# EAGLE board me433_hw2 (EAGLE 5.12)
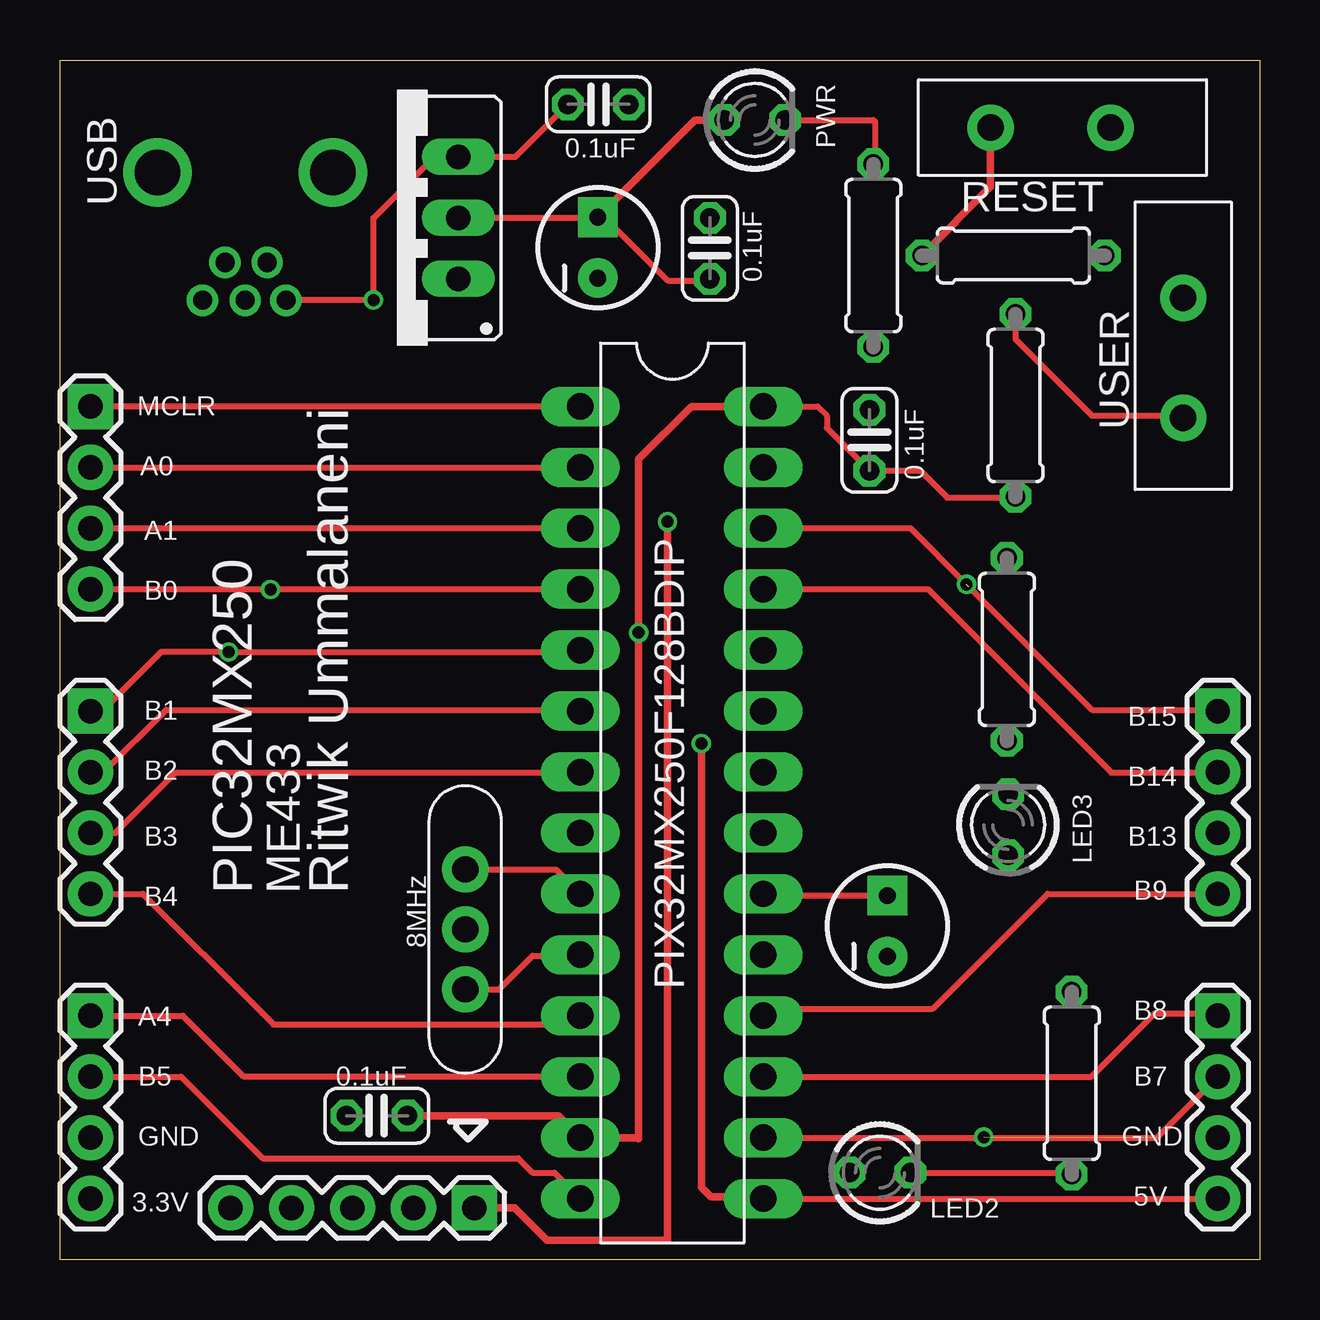
[diagram p0: board, top side]
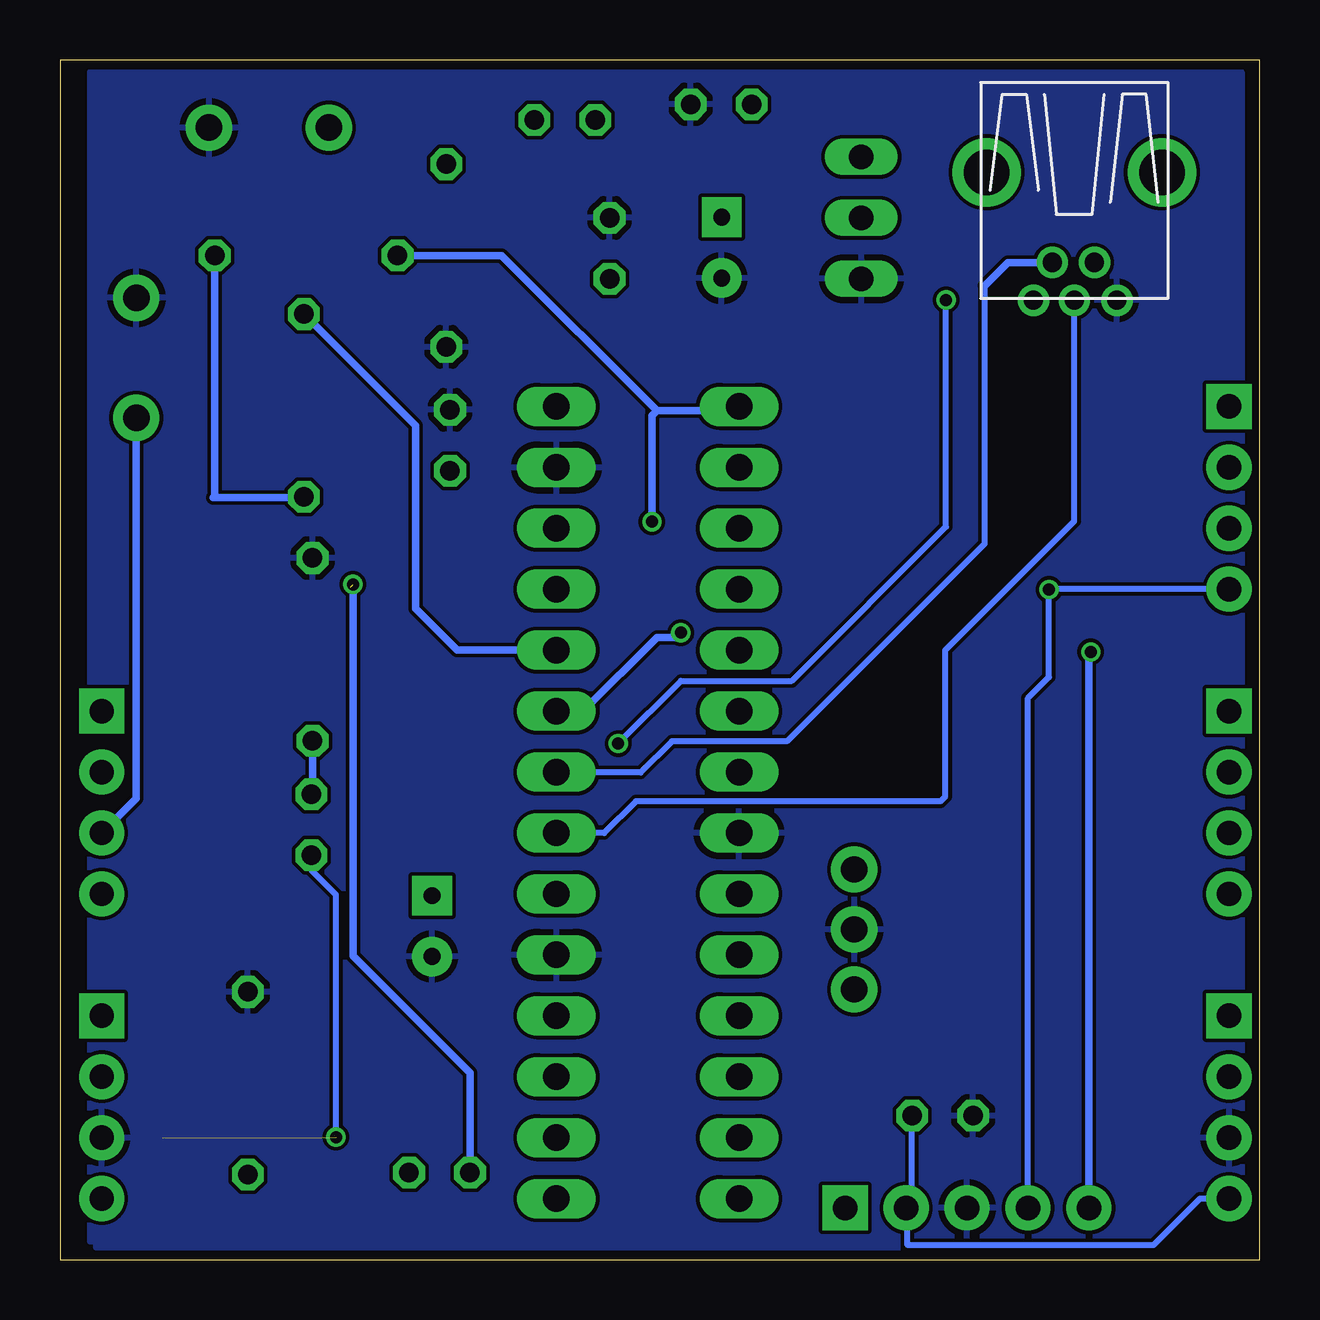
[diagram p1: board, bottom side, seen from below]

Size 50 x 50 mm. Coordinates in mm from the lower left corner, seen from the top.
Outline: 50,50 50,0 0,0 0,50 50,50
Copper layers (1*16): Top 0.035mm / dielectric 1.5mm / Bottom 0.035mm
Design rules "SeedStudio_hw2": minimum track width 6mil, minimum drill 12mil, track to track 6mil, track to pad 6mil, pad to pad 6mil, via to via 6mil, smd to smd 0mil, copper to edge 10mil, drill to drill 10mil, minimum pad ring 10mil, minimum via ring 6mil, stop-mask expansion 2mil, vias tented up to drill 100mil, thermal gap 10mil

## Footprints (pad centres in the part's own frame; a part is rotated, then mirrored left to right if it is on the bottom)
UM4 = drill 1.1 pad 1.93 round: 1 -5,-7.5; 2 0,-7.5; 3 -2.5,-7.5
C025-024X044 = drill 0.813 octagon: 1 -1.27,0; 2 1.27,0
LED3MM = drill 0.813 octagon: A -1.27,0; K 1.27,0
0207/7 = drill 0.813 octagon: 1 -3.81,0; 2 3.81,0
PIC_HEADER = drill 1.1 long: 1 -53.34,22.86; 2 -53.34,20.32; 3 -53.34,17.78; 4 -53.34,15.24; 5 -53.34,12.7; 6 -53.34,10.16; 7 -53.34,7.62; 8 -53.34,5.08; 9 -53.34,2.54; 10 -53.34,0; 11 -53.34,-2.54; 12 -53.34,-5.08; 13 -53.34,-7.62; 14 -53.34,-10.16; 15 -45.72,-10.16; 16 -45.72,-7.62; 17 -45.72,-5.08; 18 -45.72,-2.54; 19 -45.72,0; 20 -45.72,2.54; 21 -45.72,5.08; 22 -45.72,7.62; 23 -45.72,10.16; 24 -45.72,12.7; 25 -45.72,15.24; 26 -45.72,17.78; 27 -45.72,20.32; 28 -45.72,22.86
1X05 = drill 1.016 pad 1.88 square: 1 0,0 | drill 1.016 pad 1.88 round: 2 2.54,0; 3 5.08,0; 4 7.62,0; 5 10.16,0
USB-MINIB = drill 0.8 round: D+ 4.064,0; D- 2.489,0.914; GND 4.064,-1.778; ID 2.489,-0.838; VBUS 4.064,1.702 | drill 1.9 round: P$6 -1.27,-3.65; P$7 -1.27,3.65
TO220 = drill 1.016 long: 1 -2.54,0; 2 0,0; 3 2.54,0
CAP_POL_D = drill 0.7 pad 1.651 square: 1 1.27,0 | drill 0.7 pad 1.651 round: 2 -1.27,0
PUSH_SWITCH = drill 1.1 pad 1.93 round: 1 -5,0; 2 0,0
1X04 = drill 1.016 pad 1.88 square: 1 0,0 | drill 1.016 pad 1.88 round: 2 2.54,0; 3 5.08,0; 4 7.62,0

## Placement (x,y rotation side)
8MHZ  XTAL_8  [UM4]  24.39,11.26 270 top
C1  0.1uF  [C025-024X044]  22.44,48.15 0 top
C2  0.1uF  [C025-024X044]  27.09,42.15 90 top
C3  0.1uF  [C025-024X044]  33.74,34.15 90 top
C4  0.1uF  [C025-024X044]  13.21,6 180 top
LED2  [LED3MM]  34.18,3.62 0 top
LED3  [LED3MM]  39.52,18.12 90 top
PWR  [LED3MM]  28.96,47.5 0 top
R1  330  [0207/7]  33.9,41.85 90 top
R2  10k  [0207/7]  39.74,41.85 0 top
R3  10k  [0207/7]  39.83,35.6 270 top
R4  330  [0207/7]  42.17,7.35 270 top
R5  330  [0207/7]  39.47,25.43 270 top
U$1  PIX32MX250F128BDIP  [PIC_HEADER]  75.03,12.7 0 top
U$2  PICKit3  [1X05]  17.27,2.15 180 top
U$4  USB  [USB-MINIB]  7.72,44.05 270 top
U$5  LD1117  [TO220]  16.6,43.42 90 top
U$6  10uF  [CAP_POL_D]  22.42,42.18 90 top
U$8  RESET  [PUSH_SWITCH]  43.79,47.18 0 top
U$10  10uF  [CAP_POL_D]  34.49,13.9 90 top
U$12  USER  [PUSH_SWITCH]  46.82,40.09 90 top
U$13  1X04_HEADER  [1X04]  1.27,35.56 270 top
U$14  1X04_HEADER  [1X04]  1.27,22.86 270 top
U$15  1X04_HEADER  [1X04]  1.27,10.16 270 top
U$16  1X04_HEADER  [1X04]  48.26,22.86 270 top
U$17  1X04_HEADER  [1X04]  48.26,10.16 270 top

## Library data of the parts
8MHZ C1-C4 LED2 LED3 PWR R1-R5 U$1 U$4-U$6 U$8 U$10 U$12-U$17 = me422_hw2
U$2 = ME433

## Nets
3.3V: C3.1 C4.1 R2.2 R3.2 U$1.13 U$1.23 U$1.28 U$2.2 U$15.4
5V: C1.1 U$1.15 U$4.VBUS U$5.3 U$17.4
A0: U$1.2 U$13.2
A1: U$1.3 U$13.3
A4: U$1.12 U$15.1
B0: U$1.4 U$2.4 U$13.4
B1: U$1.5 U$2.5 U$14.1
B2: U$1.6 U$14.2
B3: U$1.7 U$14.3
B4: U$1.11 U$14.4
B5: U$1.14 U$15.2
B7: LED3.A U$1.16 U$17.2
B8: U$1.17 U$17.1
B9: U$1.18 U$16.4
B13: R3.1 U$1.24 U$12.1 U$16.3
B14: U$1.25 U$16.2
B15: LED2.A U$1.26 U$16.1
D+: U$1.21 U$4.D+
D-: U$1.22 U$4.D-
GND: 8MHZ.3 C1.2 C2.2 C3.2 C4.2 R1.1 R4.1 R5.1 U$1.8 U$1.19 U$1.27 U$2.3 U$4.GND U$5.1 U$6.2 U$8.2 U$10.2 U$12.2 U$15.3 U$17.3
MCLR: R2.1 U$1.1 U$2.1 U$8.1 U$13.1
N$1: PWR.K R1.2
N$2: C2.1 PWR.A U$5.2 U$6.1
N$3: LED2.K R4.2
N$4: LED3.K R5.2
N$16: U$1.20 U$10.1
POSC1: 8MHZ.1 U$1.9
POSC2: 8MHZ.2 U$1.10

## Tracks (layer width: path | path; a pad name or v marks a point on that pad's centre or on a via)
3.3V  (via drill 0.5)
  Top 0.254: U$1.28 31.57,35.56 31.96,35.17 31.96,34.66 C3.1 35.86,32.88 36.98,31.76 39.8,31.76 R3.2
  Top 0.305: C4.1 20.77,6 U$1.13 24.07,5.08 24.12,5.03 v24.12,26.13 24.12,33.37 26.31,35.56 U$1.28
  Bottom 0.254: C4.1 14.48,2.4 U$2.2 14.67,2.09 14.67,0.6 4.42,0.6 2.48,2.54 U$15.4
  Bottom 0.305: R2.2 43.55,31.82 43.62,31.76 39.86,31.76 R3.2 | U$1.23 28.19,22.86 25.12,25.93 24.32,25.93 v24.12,26.13
5V  (via drill 0.5)
  Top 0.254: U$4.VBUS 9.44,40 v13.06,40 13.06,43.42 15.61,45.96 U$5.3 18.98,45.96 C1.1 | U$1.15 U$17.4
  Top 0.305: v26.73,21.51 26.73,3.02 27.14,2.61 29.24,2.61 U$1.15
  Bottom 0.254: v13.06,40 13.06,30.55 19.5,24.12 24.12,24.12 v26.73,21.51
A0
  Top 0.254: U$13.2 U$1.2
A1
  Top 0.254: U$13.3 U$1.3
A4
  Top 0.254: U$15.1 5.12,10.16 7.64,7.64 21.67,7.64 U$1.12
B0  (via drill 0.5)
  Top 0.254: U$13.4 U$1.4
  Bottom 0.254: U$2.4 9.65,23.4 8.78,24.27 v8.78,27.93 | v8.78,27.93 v8.78,27.94 | U$13.4 8.76,27.94 v8.78,27.93
B1  (via drill 0.5)
  Top 0.254: U$14.1 1.75,22.86 4.22,25.33 v7.04,25.33 21.62,25.33 U$1.5
  Bottom 0.305: U$2.5 7.11,25.25 v7.04,25.33
B2
  Top 0.254: U$14.2 1.83,20.32 4.42,22.91 21.64,22.91 U$1.6
B3
  Top 0.254: U$14.3 2.3,17.78 4.82,20.3 21.67,20.3 U$1.7
B4
  Top 0.254: U$14.4 3.45,15.24 8.44,10.25 8.45,10.25 8.9,9.8 21.33,9.8 U$1.11 21.6,10.25
B5
  Top 0.254: U$15.2 5.04,7.62 8.44,4.22 19.09,4.22 19.7,3.62 20.61,3.62 U$1.14
B7  (via drill 0.5)  (1 unrouted)
  Top 0.254: U$17.2 45.72,5.08 U$1.16
  Bottom 0.254: LED3.A 39.52,16.22 38.5,15.2 v38.5,5.1 38.5,5.08
B8
  Top 0.254: U$1.17 43,7.62 45.63,10.25 48.17,10.25 U$17.1
B9
  Top 0.254: U$16.4 41.17,15.24 36.38,10.45 29.6,10.45 U$1.18
B13
  Top 0.254: R3.1 39.83,38.36 43.01,35.17 46.73,35.17 U$12.1
  Bottom 0.305: U$12.1 46.82,19.22 U$16.3 | U$1.24 33.44,25.4 35.17,27.14 35.17,34.76 R3.1
B14
  Top 0.254: U$1.25 36.18,27.94 43.82,20.3 48.24,20.3 U$16.2
B15  (via drill 0.5)  (1 unrouted)
  Top 0.254: U$1.26 35.45,30.48 v37.79,28.14 43.01,22.91 48.21,22.91 U$16.1
  Bottom 0.305: LED2.A 32.91,7.79 37.79,12.66 37.79,27.94 37.89,28.04
D+
  Bottom 0.254: U$4.D+ 7.72,30.78 13.1,25.4 13.1,19.3 13.3,19.1 26,19.1 27.32,17.78 U$1.21
D-
  Bottom 0.254: 11.46,40.6 11.46,29.84 19.7,21.6 24.5,21.6 25.8,20.3 29.29,20.3 U$1.22
  Bottom 0.305: U$4.D- 10.5,41.56 11.46,40.6 | U$1.22 29.29,20.3
GND
  pour Bottom: 0.75,49 0.75,0.5 48.5,0.5 48.5,0.75 48.75,0.75 48.75,49.5 0.75,49.5
MCLR  (via drill 0.5)
  Top 0.254: U$1.1 U$13.1
  Top 0.305: U$8.1 38.79,44.71 R2.1 | U$2.1 18.95,2.15 20.3,0.8 25.33,0.8 v25.33,30.75
  Bottom 0.305: R2.1 31.6,41.85 25.12,35.38 | U$1.1 21.87,35.38 25.12,35.38 | 25.12,35.38 25.33,35.17 v25.33,30.75 | U$2.1 17.29,2.13
N$1
  Top 0.254: PWR.K 33.91,47.5 33.97,47.44 33.97,45.73 R1.2
N$2
  Top 0.254: U$5.2 22.39,43.42 U$6.1 22.68,43.45 25.33,40.8 27.01,40.8 C2.1
  Top 0.305: PWR.A 26.47,47.5 U$6.1
N$3
  Top 0.254: LED2.K 42.09,3.62 R4.2
N$4
  Bottom 0.305: R5.2 39.47,19.44 LED3.K
N$16
  Top 0.254: U$10.1 29.38,15.17 U$1.20
POSC1
  Top 0.254: 8MHZ.1 20.67,16.26 U$1.9
POSC2
  Top 0.254: 8MHZ.2 18.3,11.26 19.7,12.66 21.65,12.66 U$1.10

## Text on the board
tPlace: PWR | 0.1uF | 0.1uF | MCLR | A0 | 0.1uF | A1 | B0 | B1 | B15 | B2 | B14 | B3 | B13 | LED3 | B4 | PIC32MX250 | ME433 | Ritwik Ummalaneni | B9 | 8MHz | A4 | B8 | 0.1uF | B5 | B7 | GND | GND | 3.3V | LED2 | 5V